# Altium PCB vga12-wing.PcbDoc
Units mm, origin at the board's own origin, x right, y up, seen from the top; angles counter-clockwise.
Board outline 35.56 x 43 mm, 2 copper layers (Top Layer, Bottom Layer); 16 components, 20 nets, 71 pads, 0 vias.
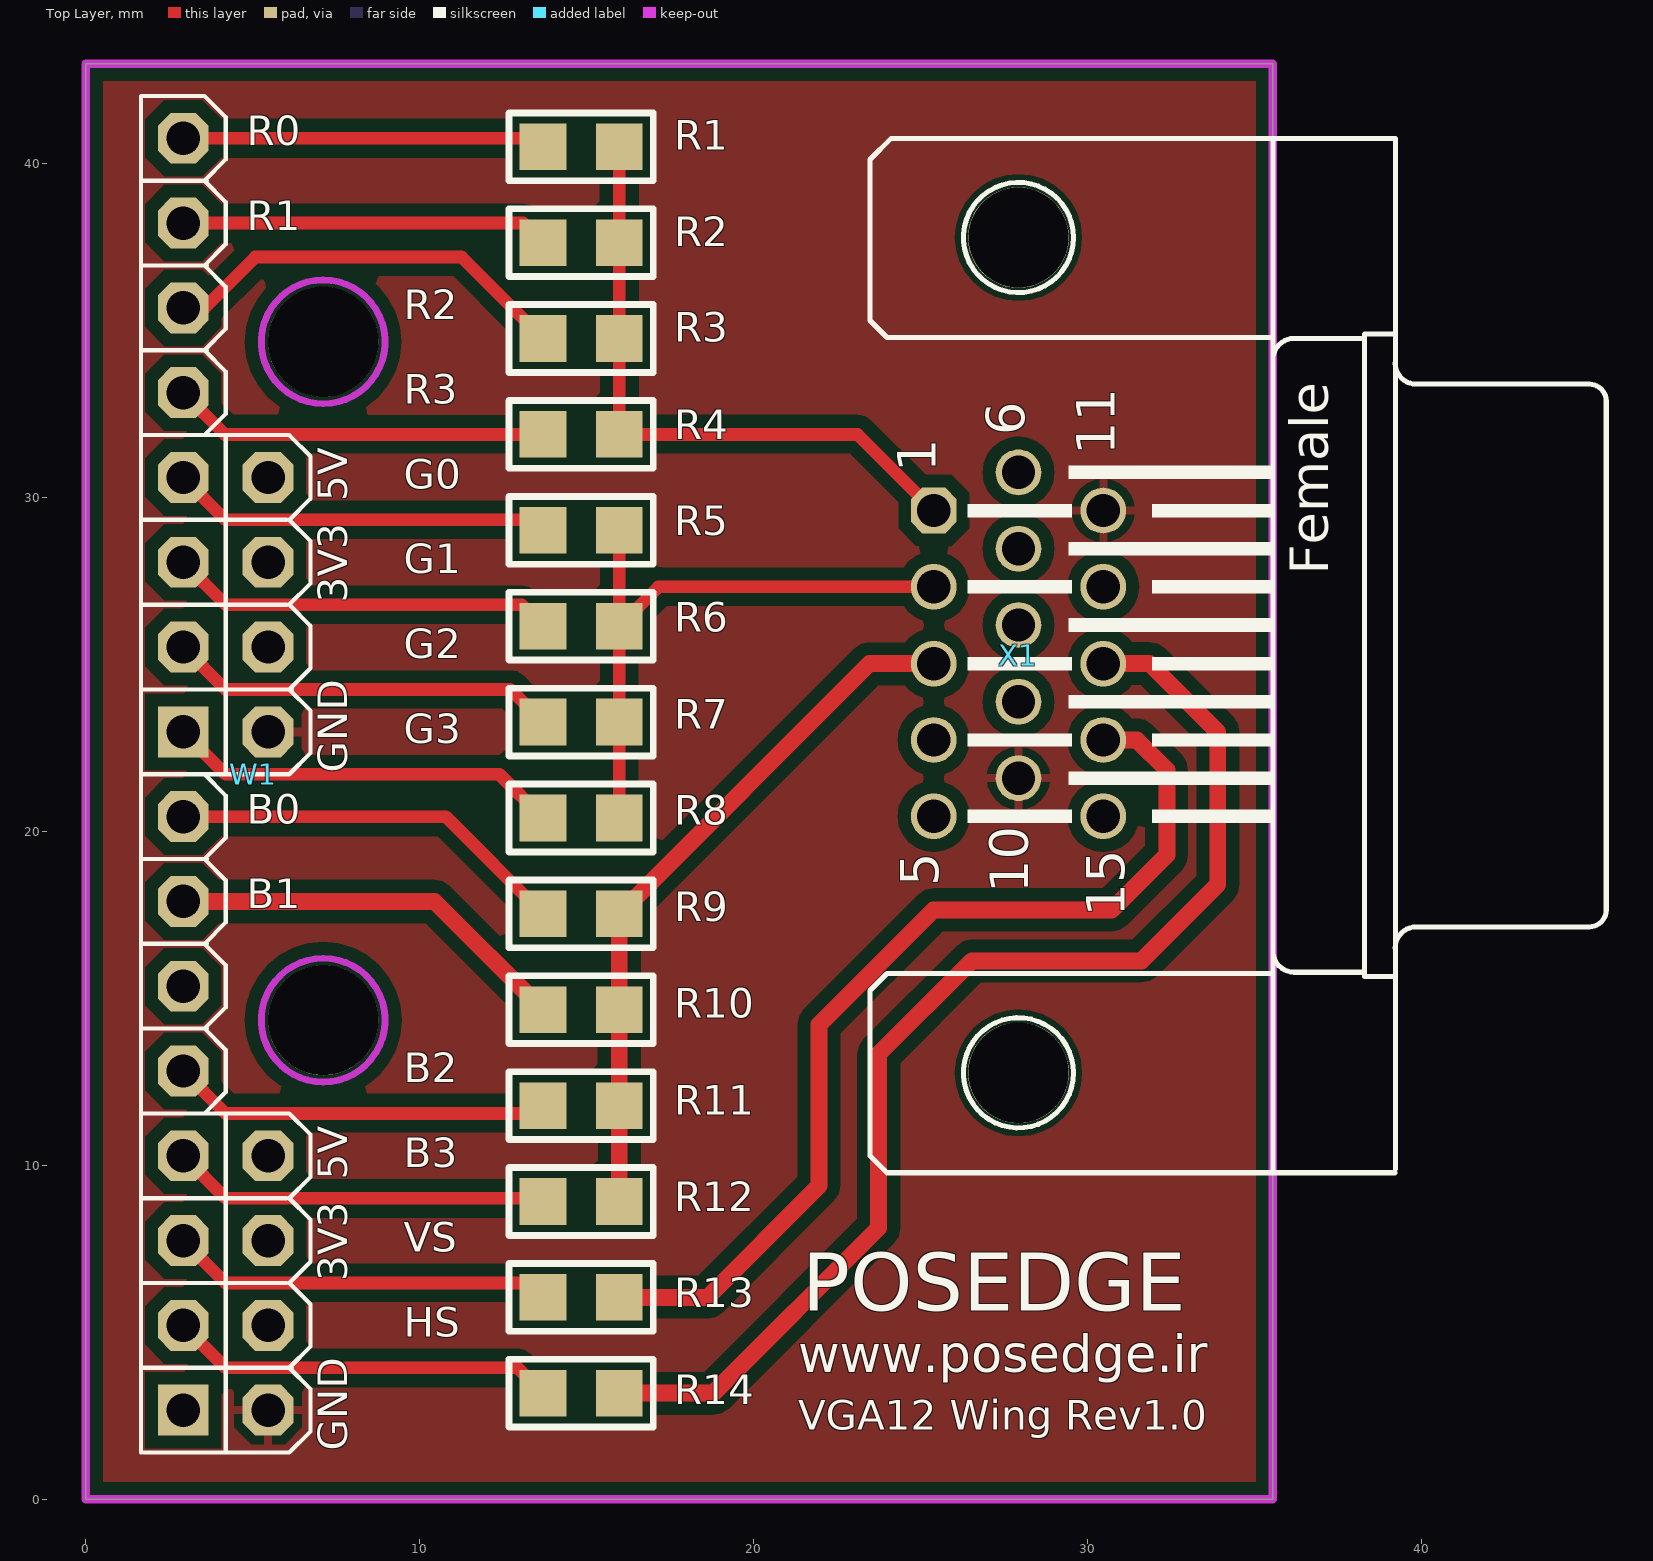
[diagram p0: Top Layer view]
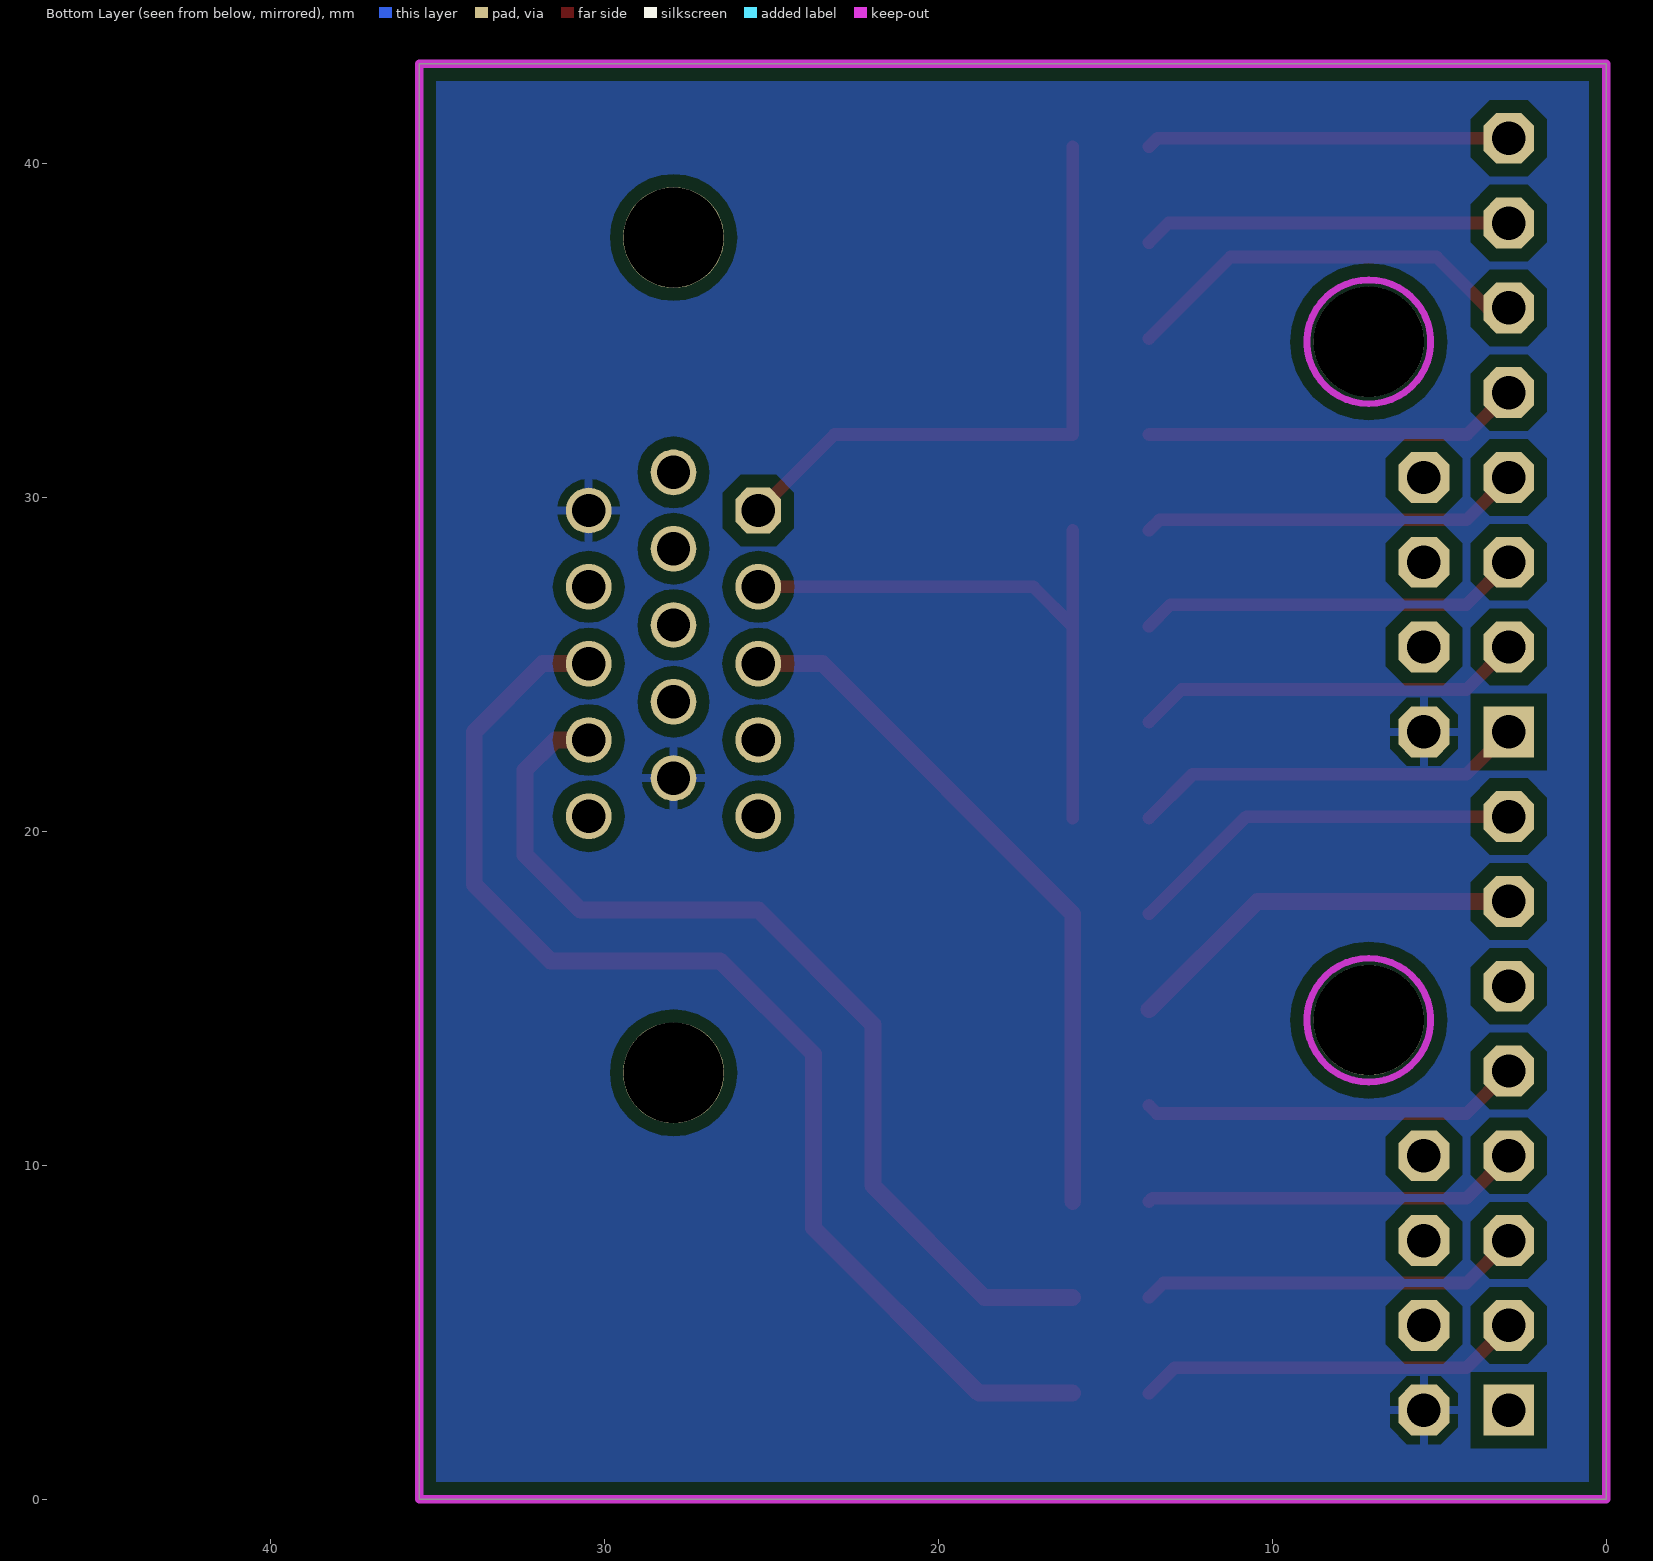
[diagram p1: Bottom Layer view, seen from below]

## Layer stack, top to bottom
Top Solder: solder mask 0.0102, Solder Resist, Dk 3.5
Top Layer: signal copper 0.0356
Dielectric 1: dielectric 0.32, FR-4, Dk 4.8
Bottom Layer: signal copper 0.0356
Bottom Solder: solder mask 0.0102, Solder Resist, Dk 3.5

## Board outline
0,0 0,43 35.56,43 35.56,0

## Design rules (kind name [scope] priority, off if disabled: settings)
Clearance Clearance_Poly_to_con [InPoly vs InComponent('P*','J*','W*','X*')] p1: gap=0.381
Clearance Clearance_poly_to_all [InNet('GND') and InPoly] p2: gap=0.381
Clearance Clearance_all_to_all [All] p3: gap=0.254
DiffPairsRouting [All] p1: maxlimit=0.254 minlimit=0.254 mostfreqgap=0.254 toplayer_minwidth=0.254 toplayer_maxwidth=0.381 toplayer_prefwidth=0.381 bottomlayer_minwidth=0.254 bottomlayer_maxwidth=0.381 bottomlayer_prefwidth=0.381 maxuncoupledlength=12.7
HoleSize [All] p1: absolutevalues=TRUE maxlimit=3.81 minlimit=0.025 maxpercent=80.000 minpercent=20.000
MinimumSolderMaskSliver [All] p1: minsoldermaskwidth=0.025
PolygonConnect PolygonConnect_1 [InNet('GND')  And InComponent('W*')] p1 off: connectstyle=Direct reliefconductorwidth=0.254 reliefentries=4 polygonreliefangle="90 Angle" airgapwidth=0.254
PolygonConnect PolygonConnect_via [IsVia] p2: connectstyle=Direct reliefconductorwidth=0.254 reliefentries=4 polygonreliefangle="90 Angle" airgapwidth=0.254
PolygonConnect PolygonConnect_GND [InNet('GND')] p3: connectstyle=Relief reliefconductorwidth=0.254 reliefentries=4 polygonreliefangle="90 Angle" airgapwidth=0.254
PolygonConnect [All] p4: connectstyle=Direct reliefconductorwidth=0.254 reliefentries=4 polygonreliefangle="90 Angle" airgapwidth=0.254
RoomDefinition vga12-wing [InComponentClass('vga12-wing')] p1: confinementstyle=ConfineIn formatcopy=TRUE lockcomponents=FALSE outline -43.307,-53.34 7.493,-53.34 7.493,-27.94 -43.307,-27.94
RoutingCorners RoutingCorners_1 [OnLayer('Top Overlay')] p1: cornerstyle=90-Degree minsetback=2.54 maxsetback=2.54
RoutingCorners [All] p2: cornerstyle=45-Degree minsetback=2.54 maxsetback=2.54
RoutingVias [All] p1: holewidth=0.5 width=0.8 viastyle="Through Hole" minholewidth=0.5 minwidth=0.8 maxholewidth=1.2 maxwidth=1.5
SilkToBoardRegionClearance [All] p1 off:
SilkToSilkClearance [All] p1: silktosilkclearance=0.076
SilkToSolderMaskClearance [IsPad] p1: minsilkscreentomaskgap=0.076 clearancetoexposedcopper=TRUE
SolderMaskExpansion [All] p1: expansion=0.102
UnRoutedNet UnRoutedNet_1 [All] p1:
UnRoutedNet [All] p2:
Width [All] p1: maxlimit=1.905 minlimit=0.254 preferedwidth=0.381 minimp=50.000000 maximp=50.000000 favimp=50.000000
22 further rules are at their usual default settings.

## Components (designator, comment, footprint, x,y, rotation, side; value= is the part's Value field where it differs from the comment)
R1 "4k" R0805_M 14.838,40.513 r180 top
R2 "2K" R0805_M 14.838,37.641 r180 top
R3 "1K" R0805_M 14.838,34.769 r180 top
R4 "510" R0805_M 14.838,31.897 r180 top
R5 "4k" R0805_M 14.838,29.024 r180 top
R6 "2K" R0805_M 14.838,26.152 r180 top
R7 "1K" R0805_M 14.838,23.28 r180 top
R8 "510" R0805_M 14.838,20.408 r180 top
R9 "4k" R0805_M 14.838,17.536 r180 top
R10 "2K" R0805_M 14.838,14.664 r180 top
R11 "1K" R0805_M 14.838,11.791 r180 top
R12 "510" R0805_M 14.838,8.919 r180 top
R13 "510" R0805_M 14.838,6.047 r180 top
R14 "510" R0805_M 14.838,3.175 r180 top
W1 "WING16_male" "WINGSIDE_16BIT - male" 2.921,2.667 r270 top
X1 "<b>SUB-D</b>" HDF15H 27.94,25.273 r90 top

## Footprints (in the part's own frame and the unit in brackets; to place one, negate y for a bottom-side part, rotate by r counter-clockwise, add the part's x,y. Pads: shape width x height; smd on the part's side, far side on the other; paste and mask are expansions set on the pad)
HDF15H [mil]
  round 119 hole 118.11: 1(-492.13,0) 1(493,0)
  oct 54x54 hole 39.37: 1(171,100)
  round 54 hole 39.37: 2(81,100) 3(-9.57,100) 4(-99.57,100) 5(-189.57,100) 6(216,0) 7(126,0) 8(36,0) 9(-54.57,0) 10(-144.57,0) 11(171,-100) 12(81,-100) 13(-9.57,-100) 14(-99.57,-100) 15(-189.57,-100)
  silkscreen extent -610,-693 610,175, body extent -603,-695 610,135, height 497
R0805_M [mil]
  rect 55x55 smd: 1(-45,0) 2(45,0)
  silkscreen extent -85,-40 85,40, body extent -39,-24 39,24, height 20
"WINGSIDE_16BIT - male" [mil]
  round 130 hole 129.92: 1(-1260,165) 1(-460,165)
  rect 60x60 hole 39.37: A1(0,0) A9(-800,0)
  oct 60x60 hole 39.37: A2(-100,0) A3(-200,0) A4(-300,0) A5(-400,0) A6(-500,0) A7(-600,0) A8(-700,0) A10(-900,0) A11(-1000,0) A12(-1100,0) A13(-1200,0) A14(-1300,0) A15(-1400,0) A16(-1500,0) P1(0,100) P2(-100,100) P3(-200,100) P4(-300,100) P5(-800,100) P6(-900,100) P7(-1000,100) P8(-1100,100)
  Top Layer keep-out lines w8: -387,165 cw(c-460,165) -533,165 cw(c-460,165) -387,165 ; -1187,165 ccw(c-1260,165) -1333,165 ccw(c-1260,165) -1187,165
  Bottom Layer keep-out lines w8: -387,165 cw(c-460,165) -533,165 cw(c-460,165) -387,165 ; -1187,165 ccw(c-1260,165) -1333,165 ccw(c-1260,165) -1187,165
  silkscreen extent -1550,-50 50,150, body extent -1550,-48 50,148, height 122

## Part data
R1 R2 R3 R4 R5 R6 R7 R8 R9 R10 R11 R12 R13 R14: library part R0805, "Chip Resistor size 0805"
W1: "Papilio Wing16"
X1: library part HF15H

## Nets (pads, with @x,y where several pads share a name; then routed paths per layer and width w, separated by ;. In a path a pad name is that pad's centre, name@x,y a point inside that pad or via, vN(x,y) a via of type N, cw(c..) or ccw(c..) an arc to the next point about the centre after c; other vN are vias at no path point)
BLUE: R9.1 R10.1 R11.1 R12.1 X1.3 | length 21.1
  Top Layer w0.508: R12.1 R11.1 R10.1 R9.1 23.476,25.03 X1.3
BLUE0: R9.2 W1.A8 | length 12
  Top Layer w0.381: W1.A8 10.784,20.447 R9.2
BLUE1: R10.2 W1.A7 | length 12.1
  Top Layer w0.508: W1.A7 10.452,17.907 R10.2
BLUE2: R11.2 W1.A5 | length 11.4
  Top Layer w0.381: W1.A5 4.191,11.557 13.461,11.557 R11.2
BLUE3: R12.2 W1.A4 | length 11.3
  Top Layer w0.381: W1.A4 4.191,9.017 13.598,9.017 R12.2
GND: W1.P1 W1.P5 X1.10 X1.11
GREEN: R5.1 R6.1 R7.1 R8.1 X1.2 | length 18.5
  Top Layer w0.381: R8.1 R7.1 R6.1 ; R5.1 R6.1 ; X1.2 17.16,27.33 R6.1
GREEN0: R5.2 W1.A12 | length 11.4
  Top Layer w0.381: W1.A12 4.191,29.337 13.383,29.337 R5.2
GREEN1: R6.2 W1.A11 | length 11.6
  Top Layer w0.381: W1.A11 4.191,26.797 13.051,26.797 R6.2
GREEN2: R7.2 W1.A10 | length 11.7
  Top Layer w0.381: W1.A10 4.191,24.257 12.719,24.257 R7.2
GREEN3: R8.2 W1.A9 | length 11.8
  Top Layer w0.381: W1.A9 4.191,21.717 12.386,21.717 R8.2
HS: R14.2 W1.A2 | length 11.6
  Top Layer w0.381: W1.A2 4.191,3.937 12.933,3.937 R14.2
HS_R: R14.1 X1.13 | length 36.1
  Top Layer w0.508: R14.1 18.796,3.175 23.749,8.128 23.749,13.335 26.543,16.129 31.623,16.129 33.909,18.415 33.909,22.987 31.866,25.03 X1.13
RED: R1.1 R2.1 R3.1 R4.1 X1.1@25.4,29.616 | length 19
  Top Layer w0.381: R1.1 R2.1 R3.1 R4.1 23.12,31.897 X1.1@25.4,29.616
RED0: R1.2 W1.A16 | length 10.9
  Top Layer w0.381: W1.A16 13.441,40.767 R1.2
RED1: R2.2 W1.A15 | length 11
  Top Layer w0.381: W1.A15 13.109,38.227 R2.2
RED2: R3.2 W1.A14 | length 12.4
  Top Layer w0.381: W1.A14 3.556,35.687 5.08,37.211 11.253,37.211 R3.2
RED3: R4.2 W1.A13 | length 11.3
  Top Layer w0.381: W1.A13 4.171,31.897 R4.2
VS: R13.2 W1.A3 | length 11.5
  Top Layer w0.381: W1.A3 4.191,6.477 13.266,6.477 R13.2
VS_R: R13.1 X1.14 | length 29.5
  Top Layer w0.508: R13.1 18.62,6.047 21.971,9.398 21.971,14.224 25.4,17.653 30.734,17.653 32.385,19.304 32.385,21.844 31.485,22.744 X1.14
pads on no net: W1.1 W1.A1 W1.A6 W1.P2 W1.P3 W1.P4 W1.P6 W1.P7 W1.P8 X1.1@27.94,12.773 X1.1@27.94,37.795 X1.4 X1.5 X1.6 X1.7 X1.8 X1.9 X1.12 X1.15

## Polygon pours and split planes (outlines as drawn)
GND on Top Layer "Bottom Layer-No Net 1" (solid, pour order 4): 0,0.127 0,43 35.56,43 35.56,0
GND on Bottom Layer "Bottom Layer-No Net 1" (solid, pour order 3): 0,0.127 0,43 35.56,43 35.56,0

## Keep-outs
Keep-Out Layer:
  the board outline again, w0.254

## Silkscreen, mask and mechanical layers (free items; w line width, h text height)
Top Overlay:
  text "R0" at 4.826,40.259 h1.52
  text "R1" at 4.826,37.719 h1.52
  text "R2" at 9.525,35.052 h1.52
  text "R3" at 9.525,32.512 h1.52
  text "G0" at 9.525,29.972 h1.52
  text "G1" at 9.525,27.432 h1.52
  text "G2" at 9.525,24.892 h1.52
  text "G3" at 9.525,22.352 h1.52
  text "B0" at 4.826,19.939 h1.52
  text "B1" at 4.826,17.399 h1.52
  text "B2" at 9.525,12.192 h1.52
  text "B3" at 9.525,9.652 h1.52
  text "VS" at 9.525,7.112 h1.52
  text "POSEDGE" at 21.463,5.08 h2.97
  text "HS" at 9.525,4.572 h1.52
  text "www.posedge.ir" at 21.336,3.429 h1.91
  text "VGA12 Wing Rev1.0" at 21.336,1.778 h1.52

## Text inside footprints (layer, text, board x,y; h text height)
W1: Top Overlay "5V" at 8.128,29.896 h1.52 r90; Top Overlay "3V3" at 8.128,26.848 h1.52 r90; Top Overlay "GND" at 8.128,21.768 h1.52 r90; Top Overlay "5V" at 8.128,9.576 h1.52 r90; Top Overlay "3V3" at 8.128,6.528 h1.52 r90; Top Overlay "GND" at 8.128,1.448 h1.52 r90
X1: Top Overlay "1" at 25.832,30.759 h1.97 r90; Top Overlay "5" at 25.933,18.358 h1.97 r90; Top Overlay "6" at 28.505,31.877 h1.97 r90; Top Overlay "10" at 28.605,18.158 h1.97 r90; Top Overlay "15" at 31.505,17.453 h1.97 r90; Top Overlay "11" at 31.205,31.267 h1.97 r90; Top Overlay "Female" at 37.592,27.686 h1.97 r90; Mechanical 16 "HDF15 CONEC" at 42.657,19.209 h1.97 r90